# Allegro board STOP-Filter_01v1.brd
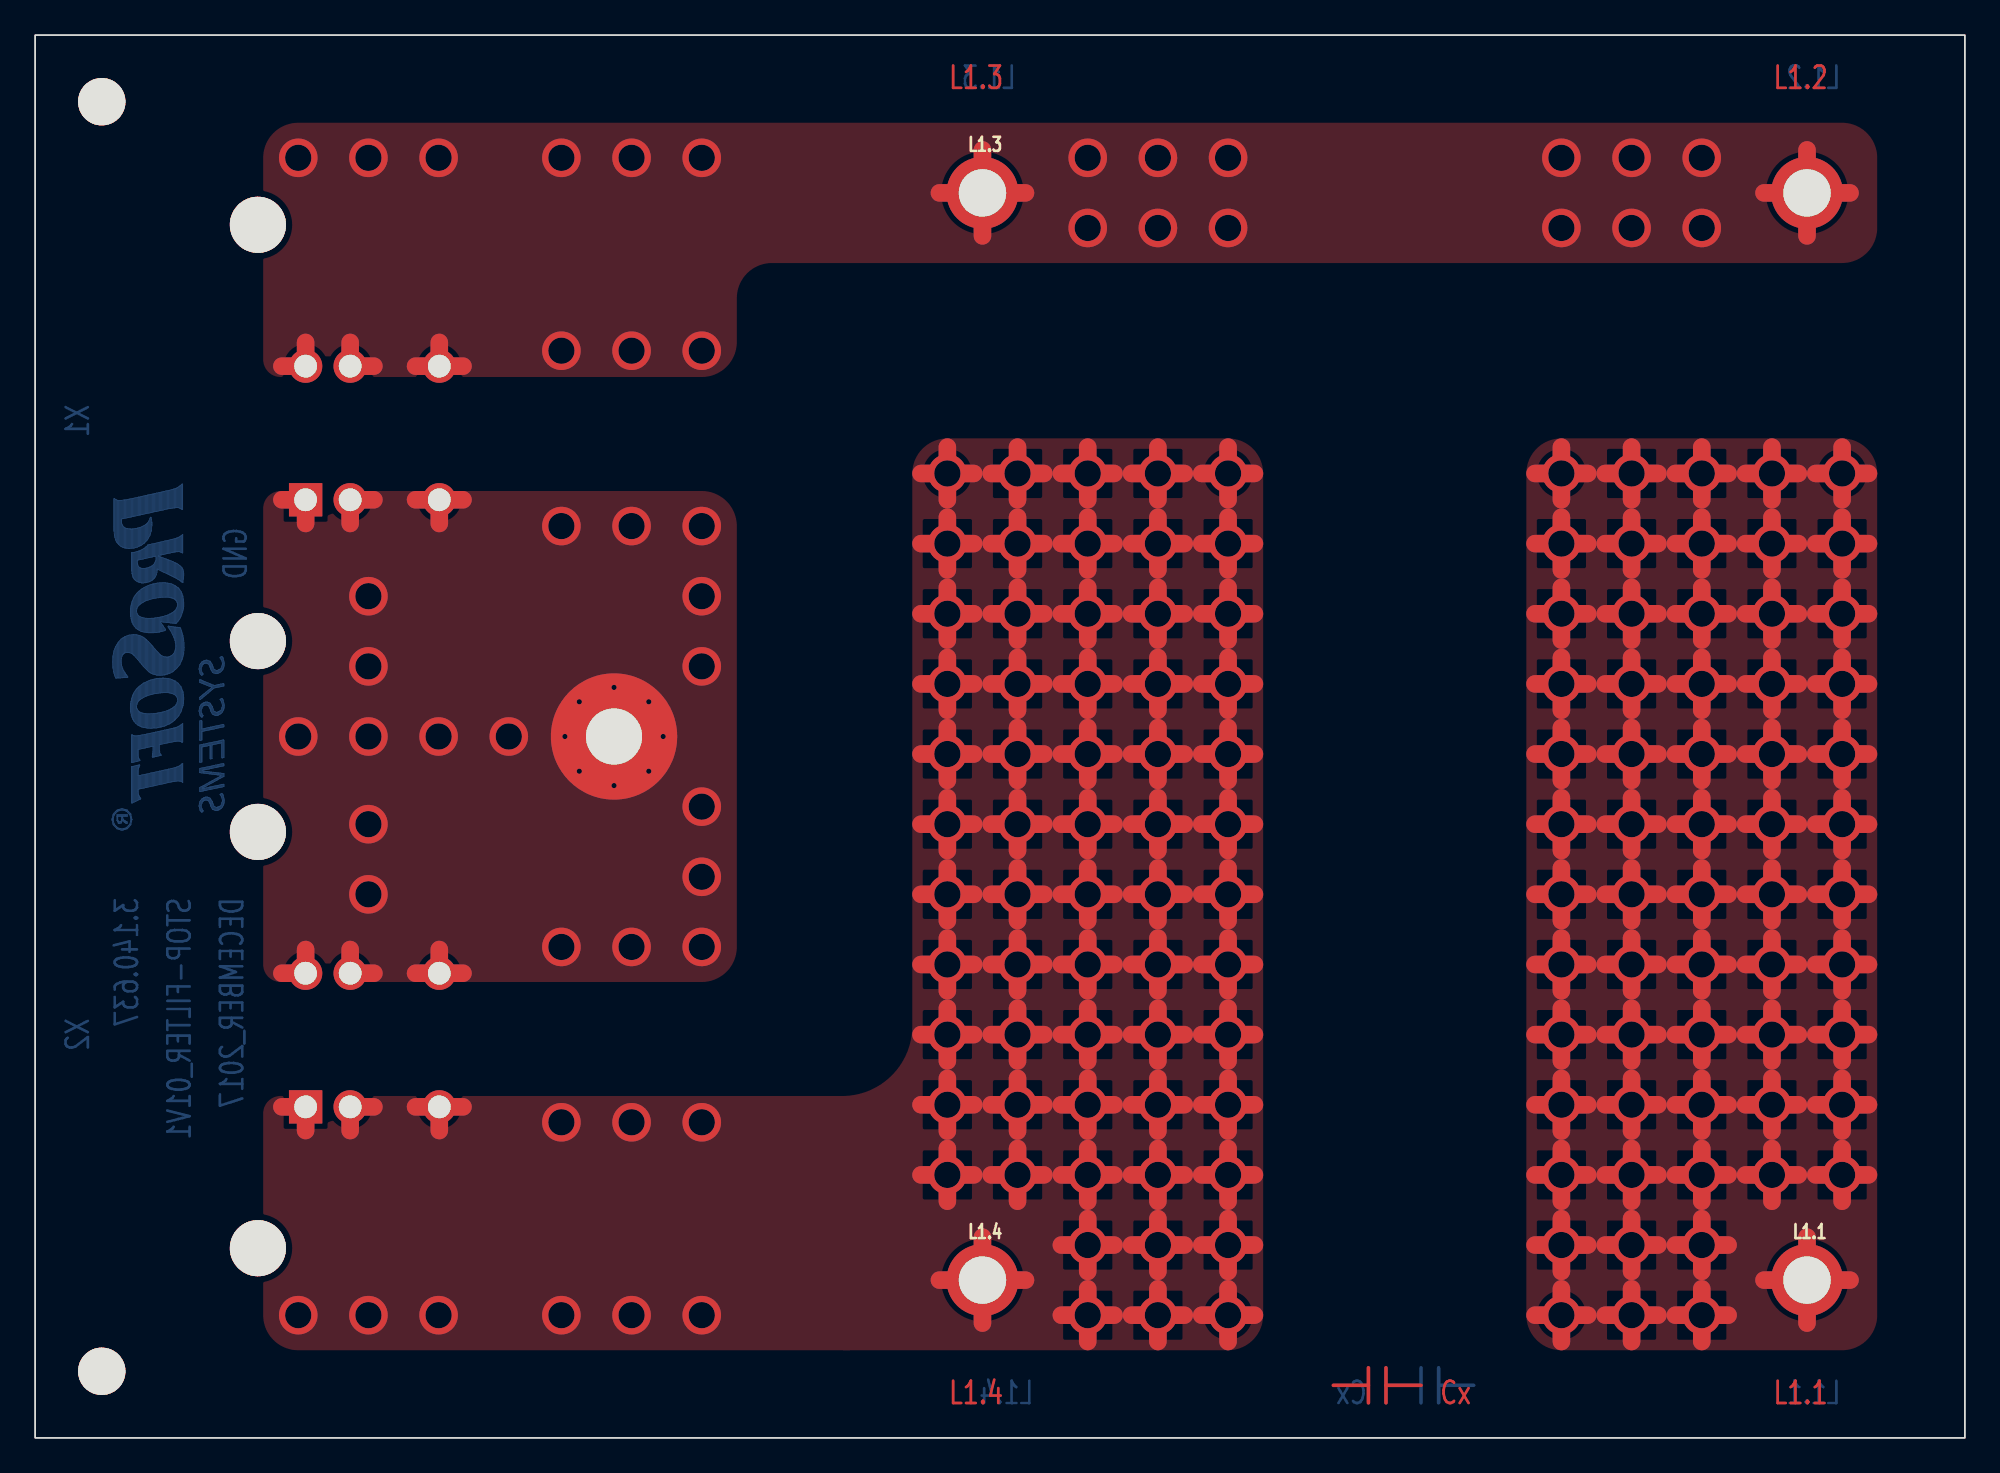
[diagram p0: board, top side]
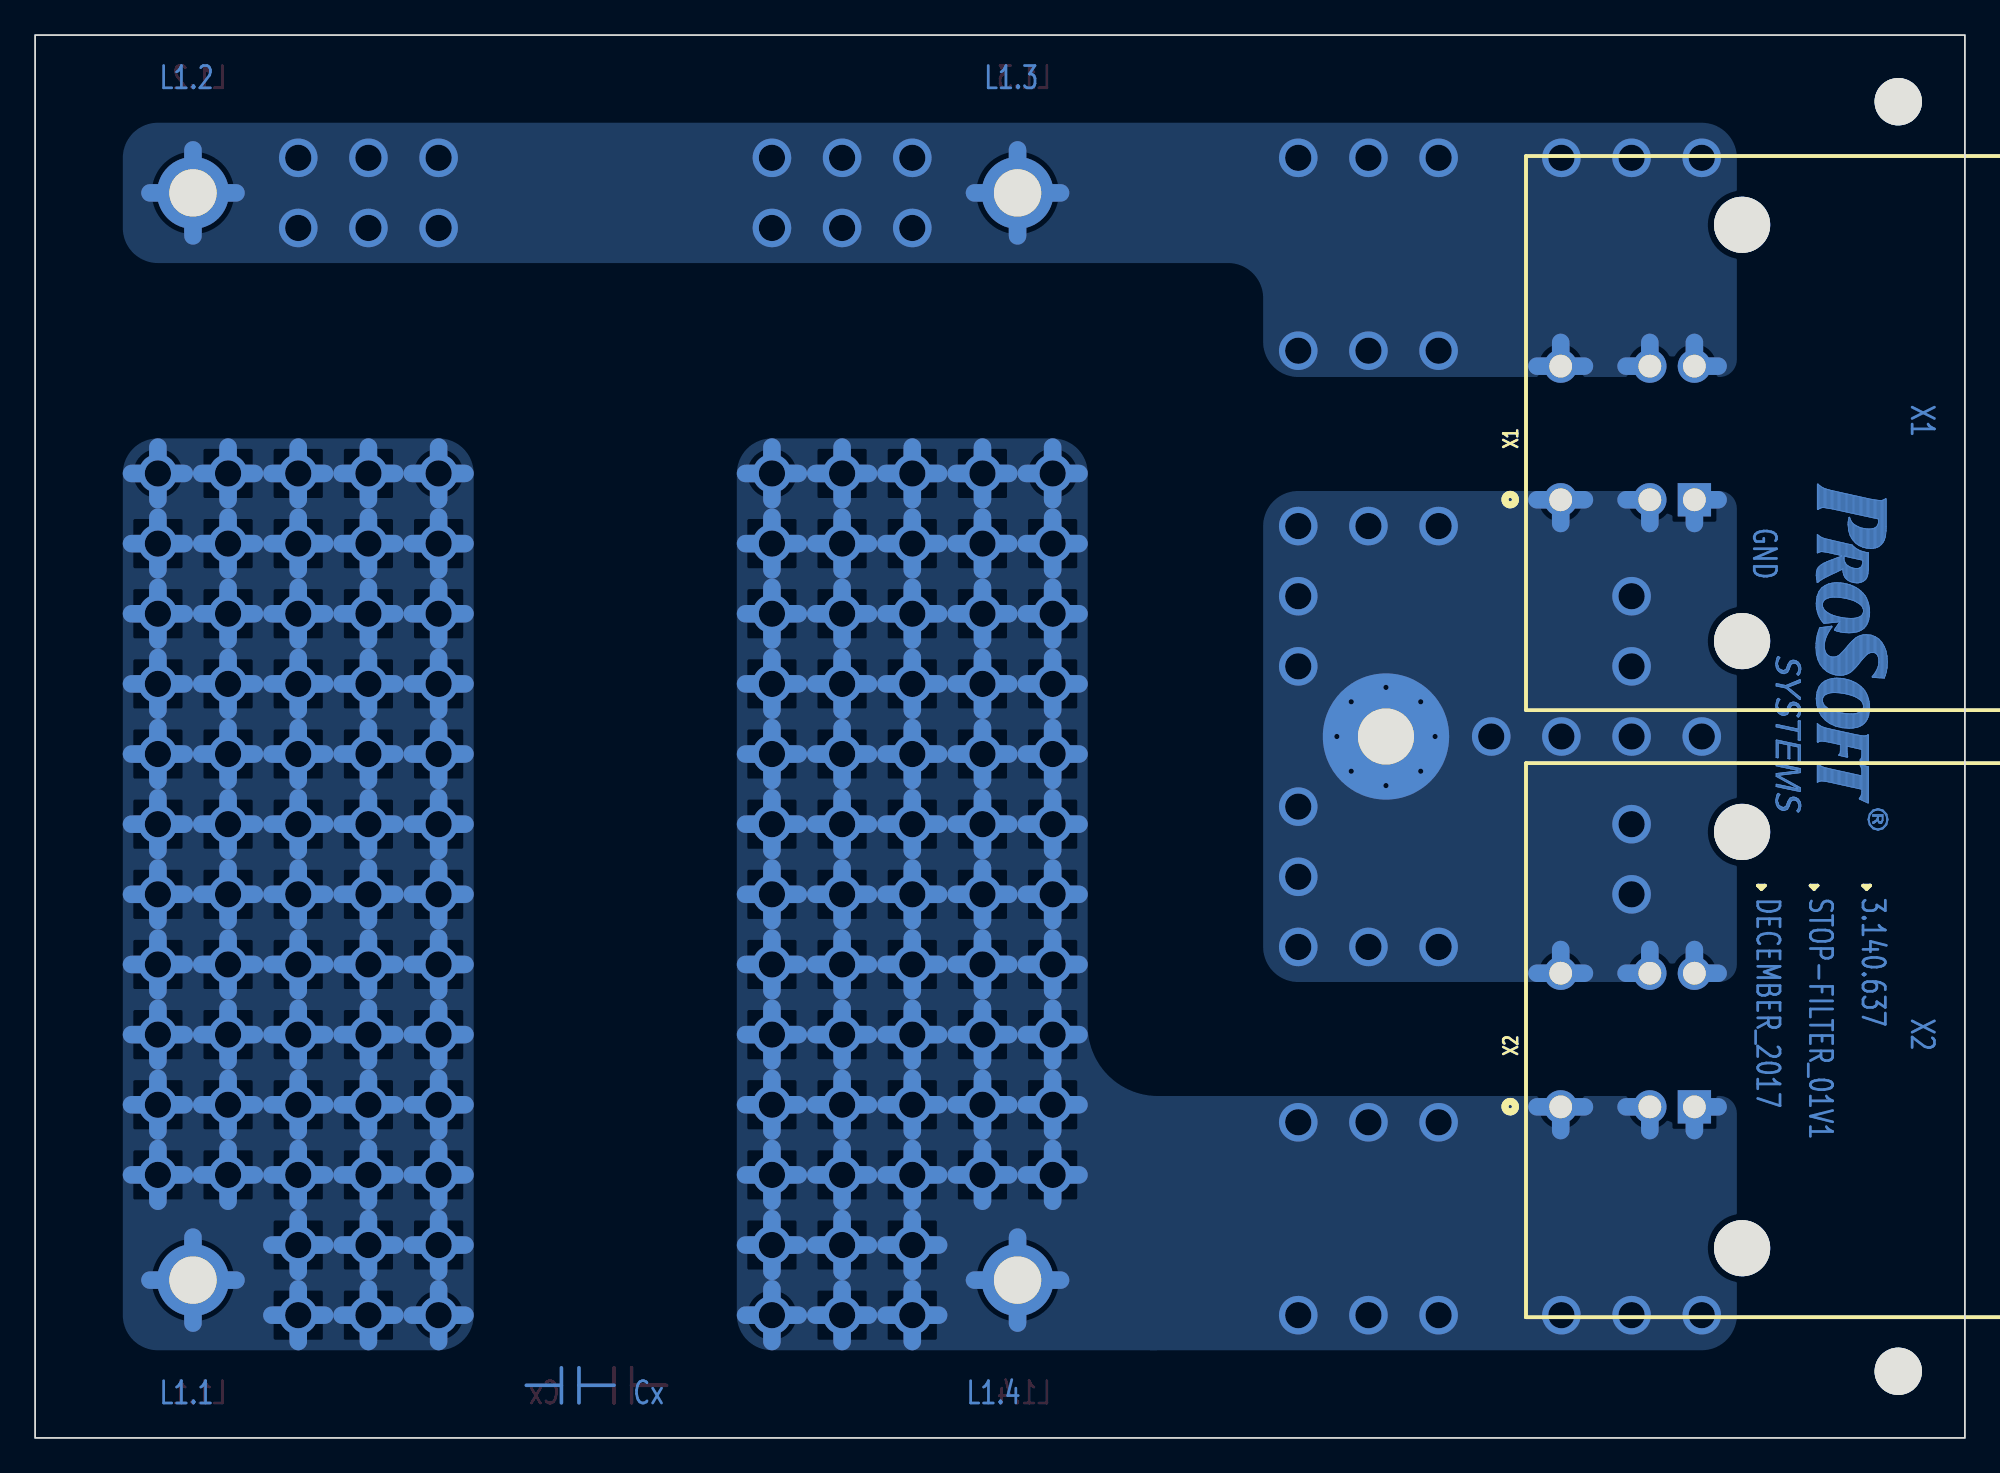
[diagram p1: board, bottom side, seen from below]

Outline 110 x 80 mm; copper layers: TOP, BOTTOM. Coordinates in mm from the lower left corner of the outline.
Outline path: rectangle 0,0 110,80

## Placement (name value [footprint] x y rotation side)
3.140.637  SILK_TEXT  [TEXT]  6 31 270 bottom
DECEMBER_2017  SILK_TEXT  [TEXT]  12 31 270 bottom
GND  3.2  [MTG720H320]  33 40 180 bottom
L1.1  2.7  [MTG410H270]  101 9 0 top
L1.2  2.7  [MTG410H270]  101 71 0 top
L1.3  2.7  [MTG410H270]  54 71 0 top
L1.4  2.7  [MTG410H270]  54 9 0 top
NOREF  -  [unnamed]  3.8 76.2 0 top
NOREF#2  -  [unnamed]  3.8 3.8 0 top
SILK1  SILK_LOGO  [PROSOFT_LOGO_20X6_LINES]  11.5 55 270 bottom
STOP-FILTER_01V1  SILK_TEXT  [TEXT]  9 31 270 bottom
X1  1720796  [PHOENIX_1720796]  15.42 53.5 90 bottom
X2  1720796  [PHOENIX_1720796]  15.42 18.88 90 bottom

## Library data of the parts
3.140.637 DECEMBER_2017 STOP-FILTER_01V1 = SILK_TEXT
GND = MH_VIAS
L1.1-L1.4 = MH
SILK1 = SILK_LOGO: alternate symbols: (PROSOFT_LOGO_3_10,PROSOFT_LOGO_30X10,PROSOFT_LOGO_50X16,PROSOFT_LOGO_60X20,PROSOFT_LOGO_70X23,PROSOFT_LOGO_80X26,PROSOFT_LOGO_92X30,PROSOFT_LOGO_20X6)
X1 X2 = CONN2+4

## Footprints (pads in the part's own frame, mm; a bottom-side part is the same pattern mirrored in y, then rotated)
MTG410H270
  round 4.1 hole 2.7: 1(0,0)
MTG720H320
  round 7.2 hole 3.2: 1(0,0)
PHOENIX_1720796
  round 3.2 hole 3.2 unplated: (-8.06,-2.72) (15.68,-2.72)
  rect 1.9x1.9 hole 1.3: 1(0,0)
  round 1.9 hole 1.3: 2(7.62,0) 3(0,2.54) 4(7.62,2.54) 5(0,7.62) 6(7.62,7.62)
unnamed
  round 2.7 hole 2.7 unplated: (0,0)

## Nets
N328712: L1.2.1 L1.3.1 X1.2 X1.4 X1.6
N328729: L1.4.1 X2.1 X2.3 X2.5
N328812: L1.1.1
N328816: GND.1 X1.1 X1.3 X1.5 X2.2 X2.4 X2.6

## Via types
v1: diameter 2.2, hole 1.5, TOP to BOTTOM, 170 vias
v2: diameter 0.8, hole 0.3, TOP to BOTTOM, 8 vias

## Routing (per net, layer and track width the routed paths; a pad name or vN(x,y) marks a point on that pad's centre or on a via; arc(x,y) is an arc through that point)
N328712: length 58.2
  TOP w1: 14.07,61.12 X1.2 15.42,62.47 ; 101,68.55 L1.2.1 ; L1.2.1 98.55,71 ; L1.2.1 101,73.45 ; L1.2.1 103.45,71 ; 17.96,62.47 X1.4 19.31,61.12 ; X1.6 24.39,61.12 ; X1.6 21.69,61.12 ; X1.6 23.04,62.47 ; 51.55,71 L1.3.1 ; L1.3.1 54,73.45 ; L1.3.1 54,68.55 ; L1.3.1 56.45,71
  BOTTOM w1: 17.96,62.47 X1.4 19.31,61.12 ; L1.3.1 56.45,71 ; L1.3.1 51.55,71 ; L1.3.1 54,73.45 ; L1.3.1 54,68.55 ; 98.55,71 L1.2.1 ; L1.2.1 103.45,71 ; L1.2.1 101,68.55 ; L1.2.1 101,73.45 ; 21.69,61.12 X1.6 ; X1.6 24.39,61.12 ; X1.6 23.04,62.47 ; 15.42,62.47 X1.2 14.07,61.12
  vias: v1(15,73) v1(19,73) v1(23,73) v1(30,73) v1(30,62) v1(34,73) v1(34,62) v1(38,73) v1(38,62) v1(60,73) v1(60,69) v1(64,73) v1(64,69) v1(68,73) v1(68,69) v1(87,73) v1(87,69) v1(91,73) v1(91,69) v1(95,73) v1(95,69)
N328729: length 771.5
  TOP w1: 68,25.5 v1(68,27) ; v1(68,27) 68,28.5 ; v1(68,27) 66.5,27 ; v1(68,27) 69.5,27 ; v1(60,43) 60,44.5 ; v1(60,43) 61.5,43 ; v1(60,43) 58.5,43 ; v1(60,43) 60,41.5 ; v1(60,11) 60,12.5 ; v1(60,11) 60,9.5 ; v1(60,11) 58.5,11 ; v1(60,11) 61.5,11 ; 62.5,31 v1(64,31) ; v1(64,31) 65.5,31 ; v1(64,31) 64,29.5 ; v1(64,31) 64,32.5 ; 54.5,47 v1(56,47) ; v1(56,47) 56,48.5 ; v1(56,47) 56,45.5 ; v1(56,47) 57.5,47 ; 60,13.5 v1(60,15) ; v1(60,15) 58.5,15 ; v1(60,15) 60,16.5 ; v1(60,15) 61.5,15 ; v1(60,31) 60,32.5 ; v1(60,31) 61.5,31 ; v1(60,31) 60,29.5 ; v1(60,31) 58.5,31 ; 62.5,51 v1(64,51) ; v1(64,51) 64,49.5 ; v1(64,51) 64,52.5 ; v1(64,51) 65.5,51 ; v1(52,19) 53.5,19 ; v1(52,19) 52,20.5 ; v1(52,19) 50.5,19 ; v1(52,19) 52,17.5 ; 52,13.5 v1(52,15) ; v1(52,15) 50.5,15 ; v1(52,15) 52,16.5 ; v1(52,15) 53.5,15 ; v1(68,23) 68,24.5 ; v1(68,23) 68,21.5 ; v1(68,23) 66.5,23 ; v1(68,23) 69.5,23 ; 56,37.5 v1(56,39) ; v1(56,39) 57.5,39 ; v1(56,39) 54.5,39 ; v1(56,39) 56,40.5 ; 51.55,9 L1.4.1 ; L1.4.1 56.45,9 ; L1.4.1 54,6.55 ; L1.4.1 54,11.45 ; v1(56,55) 56,56.5 ; v1(56,55) 57.5,55 ; v1(56,55) 56,53.5 ; v1(56,55) 54.5,55 ; v1(64,55) 65.5,55 ; v1(64,55) 62.5,55 ; v1(64,55) 64,53.5 ; v1(64,55) 64,56.5 ; v1(56,19) 56,20.5 ; v1(56,19) 56,17.5 ; v1(56,19) 54.5,19 ; v1(56,19) 57.5,19 ; v1(68,39) 68,40.5 ; v1(68,39) 69.5,39 ; v1(68,39) 68,37.5 ; v1(68,39) 66.5,39 ; 62.5,19 v1(64,19) ; v1(64,19) 65.5,19 ; v1(64,19) 64,17.5 ; v1(64,19) 64,20.5 ; v1(60,39) 60,40.5 ; v1(60,39) 61.5,39 ; v1(60,39) 60,37.5 ; v1(60,39) 58.5,39 ; v1(52,31) 52,32.5 ; v1(52,31) 50.5,31 ; v1(52,31) 52,29.5 ; v1(52,31) 53.5,31 ; 62.5,15 v1(64,15) ; v1(64,15) 65.5,15 ; v1(64,15) 64,13.5 ; v1(64,15) 64,16.5 ; 56,49.5 v1(56,51) ; v1(56,51) 56,52.5 ; v1(56,51) 57.5,51 ; v1(56,51) 54.5,51 ; v1(56,31) 57.5,31 ; v1(56,31) 56,32.5 ; v1(56,31) 54.5,31 ; v1(56,31) 56,29.5 ; v1(60,23) 60,24.5 ; v1(60,23) 60,21.5 ; v1(60,23) 61.5,23 ; v1(60,23) 58.5,23 ; v1(52,51) 52,52.5 ; v1(52,51) 52,49.5 ; v1(52,51) 50.5,51 ; v1(52,51) 53.5,51 ; v1(68,43) 68,44.5 ; v1(68,43) 68,41.5 ; v1(68,43) 69.5,43 ; v1(68,43) 66.5,43 ; v1(60,47) 61.5,47 ; v1(60,47) 60,48.5 ; v1(60,47) 60,45.5 ; v1(60,47) 58.5,47 ; v1(64,7) 64,8.5 ; v1(64,7) 64,5.5 ; v1(64,7) 62.5,7 ; v1(64,7) 65.5,7 ; v1(56,27) 57.5,27 ; v1(56,27) 54.5,27 ; v1(56,27) 56,25.5 ; v1(56,27) 56,28.5 ; v1(60,55) 61.5,55 ; v1(60,55) 60,53.5 ; v1(60,55) 60,56.5 ; v1(60,55) 58.5,55 ; 14.07,18.88 X2.1 15.42,17.53 ; v1(60,19) 61.5,19 ; v1(60,19) 58.5,19 ; v1(60,19) 60,17.5 ; v1(60,19) 60,20.5 ; v1(52,27) 52,28.5 ; v1(52,27) 53.5,27 ; v1(52,27) 50.5,27 ; v1(52,27) 52,25.5 ; v1(64,47) 65.5,47 ; v1(64,47) 62.5,47 ; v1(64,47) 64,45.5 ; v1(64,47) 64,48.5 ; v1(68,35) 68,36.5 ; v1(68,35) 66.5,35 ; v1(68,35) 68,33.5 ; v1(68,35) 69.5,35 ; X2.5 24.39,18.88 ; X2.5 21.69,18.88 ; X2.5 23.04,17.53 ; 66.5,11 v1(68,11) ; v1(68,11) 68,9.5 ; v1(68,11) 68,12.5 ; v1(68,11) 69.5,11 ; v1(52,35) 52,36.5 ; v1(52,35) 50.5,35 ; v1(52,35) 53.5,35 ; v1(52,35) 52,33.5 ; 60,33.5 v1(60,35) ; v1(60,35) 60,36.5 ; v1(60,35) 58.5,35 ; v1(60,35) 61.5,35 ; v1(56,35) 56,36.5 ; v1(56,35) 54.5,35 ; v1(56,35) 56,33.5 ; v1(56,35) 57.5,35 ; v1(68,55) 69.5,55 ; v1(68,55) 66.5,55 ; v1(68,55) 68,56.5 ; v1(68,55) 68,53.5 ; v1(64,39) 65.5,39 ; v1(64,39) 64,37.5 ; v1(64,39) 62.5,39 ; v1(64,39) 64,40.5 ; v1(64,35) 64,36.5 ; v1(64,35) 65.5,35 ; v1(64,35) 62.5,35 ; v1(64,35) 64,33.5 ; v1(64,11) 65.5,11 ; v1(64,11) 64,12.5 ; v1(64,11) 62.5,11 ; v1(64,11) 64,9.5 ; 60,5.5 v1(60,7) ; v1(60,7) 58.5,7 ; v1(60,7) 60,8.5 ; v1(60,7) 61.5,7 ; 56,13.5 v1(56,15) ; v1(56,15) 56,16.5 ; v1(56,15) 57.5,15 ; v1(56,15) 54.5,15 ; 68,29.5 v1(68,31) ; v1(68,31) 69.5,31 ; v1(68,31) 66.5,31 ; v1(68,31) 68,32.5 ; 66.5,19 v1(68,19) ; v1(68,19) 69.5,19 ; v1(68,19) 68,17.5 ; v1(68,19) 68,20.5 ; v1(64,23) 64,24.5 ; v1(64,23) 62.5,23 ; v1(64,23) 65.5,23 ; v1(64,23) 64,21.5 ; v1(68,15) 69.5,15 ; v1(68,15) 66.5,15 ; v1(68,15) 68,13.5 ; v1(68,15) 68,16.5 ; v1(52,23) 53.5,23 ; v1(52,23) 50.5,23 ; v1(52,23) 52,24.5 ; v1(52,23) 52,21.5 ; v1(52,55) 52,56.5 ; v1(52,55) 50.5,55 ; v1(52,55) 53.5,55 ; v1(52,55) 52,53.5 ; 66.5,7 v1(68,7) ; v1(68,7) 69.5,7 ; v1(68,7) 68,8.5 ; v1(68,7) 68,5.5 ; v1(52,39) 53.5,39 ; v1(52,39) 52,40.5 ; v1(52,39) 52,37.5 ; v1(52,39) 50.5,39 ; 62.5,27 v1(64,27) ; v1(64,27) 64,25.5 ; v1(64,27) 64,28.5 ; v1(64,27) 65.5,27 ; 60,25.5 v1(60,27) ; v1(60,27) 60,28.5 ; v1(60,27) 58.5,27 ; v1(60,27) 61.5,27 ; v1(52,43) 52,44.5 ; v1(52,43) 53.5,43 ; v1(52,43) 52,41.5 ; v1(52,43) 50.5,43 ; v1(56,23) 56,24.5 ; v1(56,23) 54.5,23 ; v1(56,23) 57.5,23 ; v1(56,23) 56,21.5 ; v1(56,43) 57.5,43 ; v1(56,43) 56,44.5 ; v1(56,43) 56,41.5 ; v1(56,43) 54.5,43 ; 50.5,47 v1(52,47) ; v1(52,47) 52,45.5 ; v1(52,47) 53.5,47 ; v1(52,47) 52,48.5 ; 58.5,51 v1(60,51) ; v1(60,51) 60,49.5 ; v1(60,51) 60,52.5 ; v1(60,51) 61.5,51 ; v1(68,47) 69.5,47 ; v1(68,47) 68,48.5 ; v1(68,47) 66.5,47 ; v1(68,47) 68,45.5 ; v1(64,43) 64,44.5 ; v1(64,43) 65.5,43 ; v1(64,43) 62.5,43 ; v1(64,43) 64,41.5 ; v1(68,51) 68,52.5 ; v1(68,51) 69.5,51 ; v1(68,51) 68,49.5 ; v1(68,51) 66.5,51 ; 17.96,17.53 X2.3 19.31,18.88
  BOTTOM w1: 52,13.5 v1(52,15) ; v1(52,15) 50.5,15 ; v1(52,15) 52,16.5 ; v1(52,15) 53.5,15 ; v1(60,7) 60,8.5 ; v1(60,7) 61.5,7 ; v1(60,7) 58.5,7 ; v1(60,7) 60,5.5 ; v1(52,55) 52,56.5 ; v1(52,55) 50.5,55 ; v1(52,55) 53.5,55 ; v1(52,55) 52,53.5 ; v1(60,39) 60,40.5 ; v1(60,39) 60,37.5 ; v1(60,39) 58.5,39 ; v1(60,39) 61.5,39 ; v1(64,23) 65.5,23 ; v1(64,23) 64,21.5 ; v1(64,23) 62.5,23 ; v1(64,23) 64,24.5 ; v1(64,35) 65.5,35 ; v1(64,35) 62.5,35 ; v1(64,35) 64,36.5 ; v1(64,35) 64,33.5 ; v1(60,43) 61.5,43 ; v1(60,43) 58.5,43 ; v1(60,43) 60,44.5 ; v1(60,43) 60,41.5 ; v1(68,31) 68,32.5 ; v1(68,31) 69.5,31 ; v1(68,31) 68,29.5 ; v1(68,31) 66.5,31 ; 68,17.5 v1(68,19) ; v1(68,19) 68,20.5 ; v1(68,19) 69.5,19 ; v1(68,19) 66.5,19 ; v1(64,11) 65.5,11 ; v1(64,11) 64,9.5 ; v1(64,11) 64,12.5 ; v1(64,11) 62.5,11 ; 50.5,23 v1(52,23) ; v1(52,23) 52,21.5 ; v1(52,23) 52,24.5 ; v1(52,23) 53.5,23 ; 62.5,31 v1(64,31) ; v1(64,31) 65.5,31 ; v1(64,31) 64,29.5 ; v1(64,31) 64,32.5 ; v1(52,43) 53.5,43 ; v1(52,43) 52,44.5 ; v1(52,43) 52,41.5 ; v1(52,43) 50.5,43 ; 68,13.5 v1(68,15) ; v1(68,15) 69.5,15 ; v1(68,15) 66.5,15 ; v1(68,15) 68,16.5 ; 66.5,47 v1(68,47) ; v1(68,47) 69.5,47 ; v1(68,47) 68,48.5 ; v1(68,47) 68,45.5 ; v1(52,35) 53.5,35 ; v1(52,35) 50.5,35 ; v1(52,35) 52,33.5 ; v1(52,35) 52,36.5 ; 54.5,15 v1(56,15) ; v1(56,15) 56,13.5 ; v1(56,15) 57.5,15 ; v1(56,15) 56,16.5 ; v1(64,15) 64,16.5 ; v1(64,15) 64,13.5 ; v1(64,15) 65.5,15 ; v1(64,15) 62.5,15 ; 58.5,23 v1(60,23) ; v1(60,23) 61.5,23 ; v1(60,23) 60,21.5 ; v1(60,23) 60,24.5 ; v1(60,31) 60,32.5 ; v1(60,31) 60,29.5 ; v1(60,31) 61.5,31 ; v1(60,31) 58.5,31 ; 64,53.5 v1(64,55) ; v1(64,55) 62.5,55 ; v1(64,55) 64,56.5 ; v1(64,55) 65.5,55 ; 15.42,17.53 X2.1 14.07,18.88 ; 68,25.5 v1(68,27) ; v1(68,27) 69.5,27 ; v1(68,27) 68,28.5 ; v1(68,27) 66.5,27 ; 56,45.5 v1(56,47) ; v1(56,47) 57.5,47 ; v1(56,47) 56,48.5 ; v1(56,47) 54.5,47 ; v1(68,7) 68,8.5 ; v1(68,7) 68,5.5 ; v1(68,7) 69.5,7 ; v1(68,7) 66.5,7 ; 54.5,19 v1(56,19) ; v1(56,19) 57.5,19 ; v1(56,19) 56,20.5 ; v1(56,19) 56,17.5 ; v1(60,55) 60,56.5 ; v1(60,55) 60,53.5 ; v1(60,55) 61.5,55 ; v1(60,55) 58.5,55 ; v1(52,19) 53.5,19 ; v1(52,19) 52,20.5 ; v1(52,19) 52,17.5 ; v1(52,19) 50.5,19 ; 62.5,43 v1(64,43) ; v1(64,43) 65.5,43 ; v1(64,43) 64,44.5 ; v1(64,43) 64,41.5 ; v1(64,47) 64,48.5 ; v1(64,47) 62.5,47 ; v1(64,47) 65.5,47 ; v1(64,47) 64,45.5 ; v1(60,19) 60,20.5 ; v1(60,19) 61.5,19 ; v1(60,19) 60,17.5 ; v1(60,19) 58.5,19 ; 54.5,27 v1(56,27) ; v1(56,27) 56,25.5 ; v1(56,27) 56,28.5 ; v1(56,27) 57.5,27 ; 66.5,55 v1(68,55) ; v1(68,55) 69.5,55 ; v1(68,55) 68,56.5 ; v1(68,55) 68,53.5 ; v1(56,43) 57.5,43 ; v1(56,43) 56,41.5 ; v1(56,43) 54.5,43 ; v1(56,43) 56,44.5 ; 50.5,31 v1(52,31) ; v1(52,31) 52,32.5 ; v1(52,31) 52,29.5 ; v1(52,31) 53.5,31 ; 23.04,17.53 X2.5 ; X2.5 24.39,18.88 ; X2.5 21.69,18.88 ; 60,13.5 v1(60,15) ; v1(60,15) 58.5,15 ; v1(60,15) 60,16.5 ; v1(60,15) 61.5,15 ; 56,33.5 v1(56,35) ; v1(56,35) 56,36.5 ; v1(56,35) 57.5,35 ; v1(56,35) 54.5,35 ; v1(64,27) 65.5,27 ; v1(64,27) 62.5,27 ; v1(64,27) 64,25.5 ; v1(64,27) 64,28.5 ; 58.5,35 v1(60,35) ; v1(60,35) 60,33.5 ; v1(60,35) 61.5,35 ; v1(60,35) 60,36.5 ; v1(60,11) 60,12.5 ; v1(60,11) 60,9.5 ; v1(60,11) 58.5,11 ; v1(60,11) 61.5,11 ; v1(64,7) 64,8.5 ; v1(64,7) 62.5,7 ; v1(64,7) 64,5.5 ; v1(64,7) 65.5,7 ; v1(56,39) 57.5,39 ; v1(56,39) 56,37.5 ; v1(56,39) 56,40.5 ; v1(56,39) 54.5,39 ; 64,37.5 v1(64,39) ; v1(64,39) 62.5,39 ; v1(64,39) 64,40.5 ; v1(64,39) 65.5,39 ; 58.5,51 v1(60,51) ; v1(60,51) 60,49.5 ; v1(60,51) 61.5,51 ; v1(60,51) 60,52.5 ; 66.5,35 v1(68,35) ; v1(68,35) 68,36.5 ; v1(68,35) 68,33.5 ; v1(68,35) 69.5,35 ; v1(68,39) 68,40.5 ; v1(68,39) 68,37.5 ; v1(68,39) 66.5,39 ; v1(68,39) 69.5,39 ; v1(52,51) 52,52.5 ; v1(52,51) 50.5,51 ; v1(52,51) 52,49.5 ; v1(52,51) 53.5,51 ; 62.5,51 v1(64,51) ; v1(64,51) 64,52.5 ; v1(64,51) 64,49.5 ; v1(64,51) 65.5,51 ; 66.5,11 v1(68,11) ; v1(68,11) 68,12.5 ; v1(68,11) 68,9.5 ; v1(68,11) 69.5,11 ; v1(68,51) 69.5,51 ; v1(68,51) 68,52.5 ; v1(68,51) 68,49.5 ; v1(68,51) 66.5,51 ; v1(56,55) 56,56.5 ; v1(56,55) 56,53.5 ; v1(56,55) 57.5,55 ; v1(56,55) 54.5,55 ; v1(56,23) 57.5,23 ; v1(56,23) 56,21.5 ; v1(56,23) 56,24.5 ; v1(56,23) 54.5,23 ; v1(60,47) 60,48.5 ; v1(60,47) 60,45.5 ; v1(60,47) 61.5,47 ; v1(60,47) 58.5,47 ; 56,29.5 v1(56,31) ; v1(56,31) 57.5,31 ; v1(56,31) 54.5,31 ; v1(56,31) 56,32.5 ; 52,37.5 v1(52,39) ; v1(52,39) 52,40.5 ; v1(52,39) 50.5,39 ; v1(52,39) 53.5,39 ; 17.96,17.53 X2.3 19.31,18.88 ; 66.5,43 v1(68,43) ; v1(68,43) 68,41.5 ; v1(68,43) 68,44.5 ; v1(68,43) 69.5,43 ; 52,25.5 v1(52,27) ; v1(52,27) 53.5,27 ; v1(52,27) 52,28.5 ; v1(52,27) 50.5,27 ; 56,49.5 v1(56,51) ; v1(56,51) 54.5,51 ; v1(56,51) 56,52.5 ; v1(56,51) 57.5,51 ; 50.5,47 v1(52,47) ; v1(52,47) 52,48.5 ; v1(52,47) 52,45.5 ; v1(52,47) 53.5,47 ; L1.4.1 54,11.45 ; L1.4.1 54,6.55 ; L1.4.1 51.55,9 ; L1.4.1 56.45,9 ; v1(68,23) 69.5,23 ; v1(68,23) 68,24.5 ; v1(68,23) 68,21.5 ; v1(68,23) 66.5,23 ; 58.5,27 v1(60,27) ; v1(60,27) 61.5,27 ; v1(60,27) 60,28.5 ; v1(60,27) 60,25.5 ; v1(64,19) 64,20.5 ; v1(64,19) 65.5,19 ; v1(64,19) 64,17.5 ; v1(64,19) 62.5,19
  vias: v1(15,7) v1(19,7) v1(23,7) v1(30,18) v1(30,7) v1(34,18) v1(34,7) v1(38,18) v1(38,7)
N328812: length 752.6
  TOP w1: v1(91,35) 91,36.5 ; v1(91,35) 92.5,35 ; v1(91,35) 91,33.5 ; v1(91,35) 89.5,35 ; v1(103,31) 104.5,31 ; v1(103,31) 103,32.5 ; v1(103,31) 103,29.5 ; v1(103,31) 101.5,31 ; 93.5,55 v1(95,55) ; v1(95,55) 95,56.5 ; v1(95,55) 95,53.5 ; v1(95,55) 96.5,55 ; 85.5,7 v1(87,7) ; v1(87,7) 88.5,7 ; v1(87,7) 87,5.5 ; v1(87,7) 87,8.5 ; v1(95,27) 95,28.5 ; v1(95,27) 95,25.5 ; v1(95,27) 93.5,27 ; v1(95,27) 96.5,27 ; v1(99,19) 99,20.5 ; v1(99,19) 99,17.5 ; v1(99,19) 100.5,19 ; v1(99,19) 97.5,19 ; 91,5.5 v1(91,7) ; v1(91,7) 89.5,7 ; v1(91,7) 91,8.5 ; v1(91,7) 92.5,7 ; v1(103,39) 104.5,39 ; v1(103,39) 101.5,39 ; v1(103,39) 103,37.5 ; v1(103,39) 103,40.5 ; 101.5,27 v1(103,27) ; v1(103,27) 104.5,27 ; v1(103,27) 103,28.5 ; v1(103,27) 103,25.5 ; v1(95,51) 95,52.5 ; v1(95,51) 95,49.5 ; v1(95,51) 93.5,51 ; v1(95,51) 96.5,51 ; 87,13.5 v1(87,15) ; v1(87,15) 85.5,15 ; v1(87,15) 88.5,15 ; v1(87,15) 87,16.5 ; 101.5,19 v1(103,19) ; v1(103,19) 104.5,19 ; v1(103,19) 103,17.5 ; v1(103,19) 103,20.5 ; v1(91,39) 92.5,39 ; v1(91,39) 89.5,39 ; v1(91,39) 91,37.5 ; v1(91,39) 91,40.5 ; v1(87,51) 88.5,51 ; v1(87,51) 87,52.5 ; v1(87,51) 85.5,51 ; v1(87,51) 87,49.5 ; v1(103,51) 103,52.5 ; v1(103,51) 103,49.5 ; v1(103,51) 101.5,51 ; v1(103,51) 104.5,51 ; v1(91,11) 92.5,11 ; v1(91,11) 91,9.5 ; v1(91,11) 91,12.5 ; v1(91,11) 89.5,11 ; v1(91,19) 91,20.5 ; v1(91,19) 92.5,19 ; v1(91,19) 89.5,19 ; v1(91,19) 91,17.5 ; v1(87,19) 87,20.5 ; v1(87,19) 88.5,19 ; v1(87,19) 85.5,19 ; v1(87,19) 87,17.5 ; 93.5,19 v1(95,19) ; v1(95,19) 95,20.5 ; v1(95,19) 96.5,19 ; v1(95,19) 95,17.5 ; 97.5,47 v1(99,47) ; v1(99,47) 99,45.5 ; v1(99,47) 99,48.5 ; v1(99,47) 100.5,47 ; v1(99,51) 100.5,51 ; v1(99,51) 97.5,51 ; v1(99,51) 99,49.5 ; v1(99,51) 99,52.5 ; v1(99,43) 100.5,43 ; v1(99,43) 97.5,43 ; v1(99,43) 99,44.5 ; v1(99,43) 99,41.5 ; v1(99,35) 99,36.5 ; v1(99,35) 100.5,35 ; v1(99,35) 99,33.5 ; v1(99,35) 97.5,35 ; v1(91,31) 92.5,31 ; v1(91,31) 89.5,31 ; v1(91,31) 91,29.5 ; v1(91,31) 91,32.5 ; v1(99,23) 100.5,23 ; v1(99,23) 99,24.5 ; v1(99,23) 97.5,23 ; v1(99,23) 99,21.5 ; 101.5,23 v1(103,23) ; v1(103,23) 103,21.5 ; v1(103,23) 104.5,23 ; v1(103,23) 103,24.5 ; 99,29.5 v1(99,31) ; v1(99,31) 97.5,31 ; v1(99,31) 100.5,31 ; v1(99,31) 99,32.5 ; 91,25.5 v1(91,27) ; v1(91,27) 89.5,27 ; v1(91,27) 92.5,27 ; v1(91,27) 91,28.5 ; v1(95,23) 95,24.5 ; v1(95,23) 95,21.5 ; v1(95,23) 93.5,23 ; v1(95,23) 96.5,23 ; v1(99,39) 99,40.5 ; v1(99,39) 99,37.5 ; v1(99,39) 97.5,39 ; v1(99,39) 100.5,39 ; 103,53.5 v1(103,55) ; v1(103,55) 101.5,55 ; v1(103,55) 103,56.5 ; v1(103,55) 104.5,55 ; v1(95,31) 95,32.5 ; v1(95,31) 96.5,31 ; v1(95,31) 95,29.5 ; v1(95,31) 93.5,31 ; v1(95,7) 96.5,7 ; v1(95,7) 95,5.5 ; v1(95,7) 95,8.5 ; v1(95,7) 93.5,7 ; v1(91,43) 92.5,43 ; v1(91,43) 89.5,43 ; v1(91,43) 91,44.5 ; v1(91,43) 91,41.5 ; 103,33.5 v1(103,35) ; v1(103,35) 101.5,35 ; v1(103,35) 104.5,35 ; v1(103,35) 103,36.5 ; 93.5,11 v1(95,11) ; v1(95,11) 95,9.5 ; v1(95,11) 96.5,11 ; v1(95,11) 95,12.5 ; v1(87,43) 87,44.5 ; v1(87,43) 87,41.5 ; v1(87,43) 85.5,43 ; v1(87,43) 88.5,43 ; 103,45.5 v1(103,47) ; v1(103,47) 104.5,47 ; v1(103,47) 101.5,47 ; v1(103,47) 103,48.5 ; v1(87,27) 88.5,27 ; v1(87,27) 87,25.5 ; v1(87,27) 87,28.5 ; v1(87,27) 85.5,27 ; 89.5,51 v1(91,51) ; v1(91,51) 92.5,51 ; v1(91,51) 91,52.5 ; v1(91,51) 91,49.5 ; v1(87,35) 88.5,35 ; v1(87,35) 87,36.5 ; v1(87,35) 85.5,35 ; v1(87,35) 87,33.5 ; v1(87,47) 87,48.5 ; v1(87,47) 87,45.5 ; v1(87,47) 88.5,47 ; v1(87,47) 85.5,47 ; 89.5,15 v1(91,15) ; v1(91,15) 91,16.5 ; v1(91,15) 91,13.5 ; v1(91,15) 92.5,15 ; v1(95,35) 96.5,35 ; v1(95,35) 95,36.5 ; v1(95,35) 95,33.5 ; v1(95,35) 93.5,35 ; v1(103,15) 104.5,15 ; v1(103,15) 103,16.5 ; v1(103,15) 103,13.5 ; v1(103,15) 101.5,15 ; v1(87,39) 87,40.5 ; v1(87,39) 88.5,39 ; v1(87,39) 85.5,39 ; v1(87,39) 87,37.5 ; 87,9.5 v1(87,11) ; v1(87,11) 87,12.5 ; v1(87,11) 85.5,11 ; v1(87,11) 88.5,11 ; 99,53.5 v1(99,55) ; v1(99,55) 100.5,55 ; v1(99,55) 97.5,55 ; v1(99,55) 99,56.5 ; v1(95,43) 95,44.5 ; v1(95,43) 95,41.5 ; v1(95,43) 93.5,43 ; v1(95,43) 96.5,43 ; 93.5,39 v1(95,39) ; v1(95,39) 96.5,39 ; v1(95,39) 95,40.5 ; v1(95,39) 95,37.5 ; v1(87,31) 87,32.5 ; v1(87,31) 88.5,31 ; v1(87,31) 87,29.5 ; v1(87,31) 85.5,31 ; 95,13.5 v1(95,15) ; v1(95,15) 93.5,15 ; v1(95,15) 95,16.5 ; v1(95,15) 96.5,15 ; v1(99,27) 100.5,27 ; v1(99,27) 99,25.5 ; v1(99,27) 99,28.5 ; v1(99,27) 97.5,27 ; 98.55,9 L1.1.1 ; L1.1.1 101,6.55 ; L1.1.1 103.45,9 ; L1.1.1 101,11.45 ; 91,21.5 v1(91,23) ; v1(91,23) 91,24.5 ; v1(91,23) 89.5,23 ; v1(91,23) 92.5,23 ; v1(103,43) 104.5,43 ; v1(103,43) 103,41.5 ; v1(103,43) 103,44.5 ; v1(103,43) 101.5,43 ; 85.5,23 v1(87,23) ; v1(87,23) 88.5,23 ; v1(87,23) 87,24.5 ; v1(87,23) 87,21.5 ; v1(91,47) 91,48.5 ; v1(91,47) 92.5,47 ; v1(91,47) 91,45.5 ; v1(91,47) 89.5,47 ; 99,13.5 v1(99,15) ; v1(99,15) 97.5,15 ; v1(99,15) 100.5,15 ; v1(99,15) 99,16.5 ; 91,53.5 v1(91,55) ; v1(91,55) 89.5,55 ; v1(91,55) 91,56.5 ; v1(91,55) 92.5,55 ; v1(95,47) 95,48.5 ; v1(95,47) 95,45.5 ; v1(95,47) 93.5,47 ; v1(95,47) 96.5,47 ; 87,53.5 v1(87,55) ; v1(87,55) 87,56.5 ; v1(87,55) 88.5,55 ; v1(87,55) 85.5,55
  BOTTOM w1: 98.55,9 L1.1.1 ; L1.1.1 103.45,9 ; L1.1.1 101,11.45 ; L1.1.1 101,6.55 ; v1(91,39) 91,40.5 ; v1(91,39) 92.5,39 ; v1(91,39) 91,37.5 ; v1(91,39) 89.5,39 ; v1(91,11) 91,12.5 ; v1(91,11) 89.5,11 ; v1(91,11) 92.5,11 ; v1(91,11) 91,9.5 ; 101.5,19 v1(103,19) ; v1(103,19) 104.5,19 ; v1(103,19) 103,20.5 ; v1(103,19) 103,17.5 ; v1(87,43) 88.5,43 ; v1(87,43) 85.5,43 ; v1(87,43) 87,44.5 ; v1(87,43) 87,41.5 ; 95,49.5 v1(95,51) ; v1(95,51) 93.5,51 ; v1(95,51) 95,52.5 ; v1(95,51) 96.5,51 ; v1(99,15) 99,16.5 ; v1(99,15) 100.5,15 ; v1(99,15) 99,13.5 ; v1(99,15) 97.5,15 ; 87,13.5 v1(87,15) ; v1(87,15) 85.5,15 ; v1(87,15) 87,16.5 ; v1(87,15) 88.5,15 ; 101.5,31 v1(103,31) ; v1(103,31) 103,29.5 ; v1(103,31) 103,32.5 ; v1(103,31) 104.5,31 ; 91,17.5 v1(91,19) ; v1(91,19) 89.5,19 ; v1(91,19) 91,20.5 ; v1(91,19) 92.5,19 ; 95,9.5 v1(95,11) ; v1(95,11) 96.5,11 ; v1(95,11) 93.5,11 ; v1(95,11) 95,12.5 ; 87,17.5 v1(87,19) ; v1(87,19) 85.5,19 ; v1(87,19) 88.5,19 ; v1(87,19) 87,20.5 ; 91,53.5 v1(91,55) ; v1(91,55) 91,56.5 ; v1(91,55) 92.5,55 ; v1(91,55) 89.5,55 ; v1(87,31) 88.5,31 ; v1(87,31) 87,29.5 ; v1(87,31) 85.5,31 ; v1(87,31) 87,32.5 ; v1(95,43) 96.5,43 ; v1(95,43) 95,44.5 ; v1(95,43) 95,41.5 ; v1(95,43) 93.5,43 ; 103,45.5 v1(103,47) ; v1(103,47) 104.5,47 ; v1(103,47) 101.5,47 ; v1(103,47) 103,48.5 ; v1(87,55) 88.5,55 ; v1(87,55) 87,56.5 ; v1(87,55) 85.5,55 ; v1(87,55) 87,53.5 ; v1(87,23) 87,24.5 ; v1(87,23) 85.5,23 ; v1(87,23) 87,21.5 ; v1(87,23) 88.5,23 ; v1(95,7) 95,8.5 ; v1(95,7) 95,5.5 ; v1(95,7) 96.5,7 ; v1(95,7) 93.5,7 ; v1(87,47) 88.5,47 ; v1(87,47) 85.5,47 ; v1(87,47) 87,45.5 ; v1(87,47) 87,48.5 ; 103,21.5 v1(103,23) ; v1(103,23) 101.5,23 ; v1(103,23) 103,24.5 ; v1(103,23) 104.5,23 ; v1(99,55) 99,56.5 ; v1(99,55) 97.5,55 ; v1(99,55) 100.5,55 ; v1(99,55) 99,53.5 ; 87,33.5 v1(87,35) ; v1(87,35) 88.5,35 ; v1(87,35) 87,36.5 ; v1(87,35) 85.5,35 ; 91,49.5 v1(91,51) ; v1(91,51) 91,52.5 ; v1(91,51) 92.5,51 ; v1(91,51) 89.5,51 ; v1(103,15) 103,16.5 ; v1(103,15) 101.5,15 ; v1(103,15) 104.5,15 ; v1(103,15) 103,13.5 ; 95,45.5 v1(95,47) ; v1(95,47) 96.5,47 ; v1(95,47) 95,48.5 ; v1(95,47) 93.5,47 ; v1(95,55) 95,56.5 ; v1(95,55) 93.5,55 ; v1(95,55) 95,53.5 ; v1(95,55) 96.5,55 ; 97.5,43 v1(99,43) ; v1(99,43) 100.5,43 ; v1(99,43) 99,44.5 ; v1(99,43) 99,41.5 ; 97.5,27 v1(99,27) ; v1(99,27) 99,28.5 ; v1(99,27) 99,25.5 ; v1(99,27) 100.5,27 ; v1(91,31) 91,32.5 ; v1(91,31) 89.5,31 ; v1(91,31) 92.5,31 ; v1(91,31) 91,29.5 ; v1(91,23) 91,24.5 ; v1(91,23) 89.5,23 ; v1(91,23) 92.5,23 ; v1(91,23) 91,21.5 ; v1(99,23) 99,24.5 ; v1(99,23) 100.5,23 ; v1(99,23) 97.5,23 ; v1(99,23) 99,21.5 ; 95,25.5 v1(95,27) ; v1(95,27) 93.5,27 ; v1(95,27) 96.5,27 ; v1(95,27) 95,28.5 ; v1(103,35) 104.5,35 ; v1(103,35) 103,33.5 ; v1(103,35) 101.5,35 ; v1(103,35) 103,36.5 ; v1(103,55) 104.5,55 ; v1(103,55) 103,56.5 ; v1(103,55) 101.5,55 ; v1(103,55) 103,53.5 ; 93.5,35 v1(95,35) ; v1(95,35) 96.5,35 ; v1(95,35) 95,33.5 ; v1(95,35) 95,36.5 ; 93.5,39 v1(95,39) ; v1(95,39) 95,40.5 ; v1(95,39) 95,37.5 ; v1(95,39) 96.5,39 ; 89.5,15 v1(91,15) ; v1(91,15) 92.5,15 ; v1(91,15) 91,16.5 ; v1(91,15) 91,13.5 ; 85.5,51 v1(87,51) ; v1(87,51) 87,49.5 ; v1(87,51) 88.5,51 ; v1(87,51) 87,52.5 ; v1(99,47) 99,48.5 ; v1(99,47) 97.5,47 ; v1(99,47) 100.5,47 ; v1(99,47) 99,45.5 ; v1(95,31) 96.5,31 ; v1(95,31) 95,32.5 ; v1(95,31) 95,29.5 ; v1(95,31) 93.5,31 ; v1(99,35) 99,36.5 ; v1(99,35) 100.5,35 ; v1(99,35) 97.5,35 ; v1(99,35) 99,33.5 ; 99,17.5 v1(99,19) ; v1(99,19) 100.5,19 ; v1(99,19) 97.5,19 ; v1(99,19) 99,20.5 ; 91,25.5 v1(91,27) ; v1(91,27) 92.5,27 ; v1(91,27) 89.5,27 ; v1(91,27) 91,28.5 ; v1(103,27) 104.5,27 ; v1(103,27) 103,25.5 ; v1(103,27) 101.5,27 ; v1(103,27) 103,28.5 ; v1(91,43) 91,44.5 ; v1(91,43) 89.5,43 ; v1(91,43) 91,41.5 ; v1(91,43) 92.5,43 ; 97.5,31 v1(99,31) ; v1(99,31) 99,32.5 ; v1(99,31) 100.5,31 ; v1(99,31) 99,29.5 ; 87,37.5 v1(87,39) ; v1(87,39) 87,40.5 ; v1(87,39) 88.5,39 ; v1(87,39) 85.5,39 ; v1(87,11) 88.5,11 ; v1(87,11) 87,12.5 ; v1(87,11) 87,9.5 ; v1(87,11) 85.5,11 ; v1(103,43) 103,44.5 ; v1(103,43) 103,41.5 ; v1(103,43) 104.5,43 ; v1(103,43) 101.5,43 ; 91,45.5 v1(91,47) ; v1(91,47) 92.5,47 ; v1(91,47) 91,48.5 ; v1(91,47) 89.5,47 ; v1(95,23) 96.5,23 ; v1(95,23) 95,21.5 ; v1(95,23) 93.5,23 ; v1(95,23) 95,24.5 ; v1(95,15) 96.5,15 ; v1(95,15) 95,16.5 ; v1(95,15) 93.5,15 ; v1(95,15) 95,13.5 ; v1(95,19) 95,20.5 ; v1(95,19) 95,17.5 ; v1(95,19) 96.5,19 ; v1(95,19) 93.5,19 ; v1(99,51) 99,52.5 ; v1(99,51) 99,49.5 ; v1(99,51) 100.5,51 ; v1(99,51) 97.5,51 ; 99,37.5 v1(99,39) ; v1(99,39) 97.5,39 ; v1(99,39) 99,40.5 ; v1(99,39) 100.5,39 ; 87,25.5 v1(87,27) ; v1(87,27) 88.5,27 ; v1(87,27) 87,28.5 ; v1(87,27) 85.5,27 ; v1(91,35) 92.5,35 ; v1(91,35) 91,36.5 ; v1(91,35) 91,33.5 ; v1(91,35) 89.5,35 ; 101.5,51 v1(103,51) ; v1(103,51) 103,49.5 ; v1(103,51) 103,52.5 ; v1(103,51) 104.5,51 ; 101.5,39 v1(103,39) ; v1(103,39) 103,37.5 ; v1(103,39) 103,40.5 ; v1(103,39) 104.5,39 ; v1(91,7) 92.5,7 ; v1(91,7) 89.5,7 ; v1(91,7) 91,5.5 ; v1(91,7) 91,8.5 ; v1(87,7) 87,8.5 ; v1(87,7) 88.5,7 ; v1(87,7) 87,5.5 ; v1(87,7) 85.5,7
N328816: length 37.9
  TOP w1: 15.42,52.15 X1.1 14.07,53.5 ; 19.31,53.5 X1.3 17.96,52.15 ; 23.04,52.15 X1.5 ; X1.5 21.69,53.5 ; X1.5 24.39,53.5 ; 14.07,26.5 X2.2 15.42,27.85 ; X2.6 23.04,27.85 ; X2.6 21.69,26.5 ; X2.6 24.39,26.5 ; 17.96,27.85 X2.4 19.31,26.5
  BOTTOM w1: 14.07,26.5 X2.2 15.42,27.85 ; 21.69,26.5 X2.6 ; X2.6 24.39,26.5 ; X2.6 23.04,27.85 ; 23.04,52.15 X1.5 ; X1.5 24.39,53.5 ; X1.5 21.69,53.5 ; 14.07,53.5 X1.1 15.42,52.15 ; 19.31,26.5 X2.4 17.96,27.85 ; 19.31,53.5 X1.3 17.96,52.15
  vias: v1(15,40) v1(19,48) v1(19,44) v1(19,40) v1(19,35) v1(19,31) v1(23,40) v1(27,40) v1(30,52) v1(30,28) v1(34,52) v1(34,28) v1(38,52) v1(38,48) v1(38,44) v1(38,36) v1(38,32) v1(38,28) v2(30.2,40) v2(31.02,41.98) v2(31.02,38.02) v2(33,42.8) v2(33,37.2) v2(34.98,41.98) v2(34.98,38.02) v2(35.8,40)

## Copper pours and planes (outline as drawn; the poured copper is in the pictures)
N328712 on TOP, BOTTOM: 103,75 104.41,74.41 105,73 105,69 104.41,67.59 103,67 42,67 40.59,66.41 40,65 40,62.5 39.41,61.09 38,60.5 14,60.5 13.29,60.79 13,61.5 13,73 13.59,74.41 15,75
N328812 on TOP, BOTTOM: 87,57 85.59,56.41 85,55 85,7 85.59,5.59 87,5 103,5 104.41,5.59 105,7 105,55 104.41,56.41 103,57
N328816 on TOP, BOTTOM: 13,53 13.29,53.71 14,54 38,54 39.41,53.41 40,52 40,28 39.41,26.59 38,26 14,26 13.29,26.29 13,27
N328729 on TOP, BOTTOM: 52,57 50.59,56.41 50,55 50,23.5 48.83,20.67 46,19.5 46,5 68,5 69.41,5.59 70,7 70,55 69.41,56.41 68,57
N328729 on TOP, BOTTOM: 15,5 13.59,5.59 13,7 13,18.5 13.32,19.24 14.08,19.5 46.5,19.5 46.5,5

## Text on the board
BOTTOM: L1.3 | L1.4 | Cx | L1.2 | L1.1 | X1 | X2
TOP: Cx
